# Altium PCB somiqboard.PcbDoc (part 2 of 10)
Units mm, origin at the board's own origin, x right, y up, seen from the top; angles counter-clockwise.
Board outline 110 x 96 mm, 4 copper layers (Top Layer, Ground_Plane, Power_Plane, Bottom Layer), stack 1.454 mm thick; 221 components, 356 nets, 1185 pads, 539 vias.
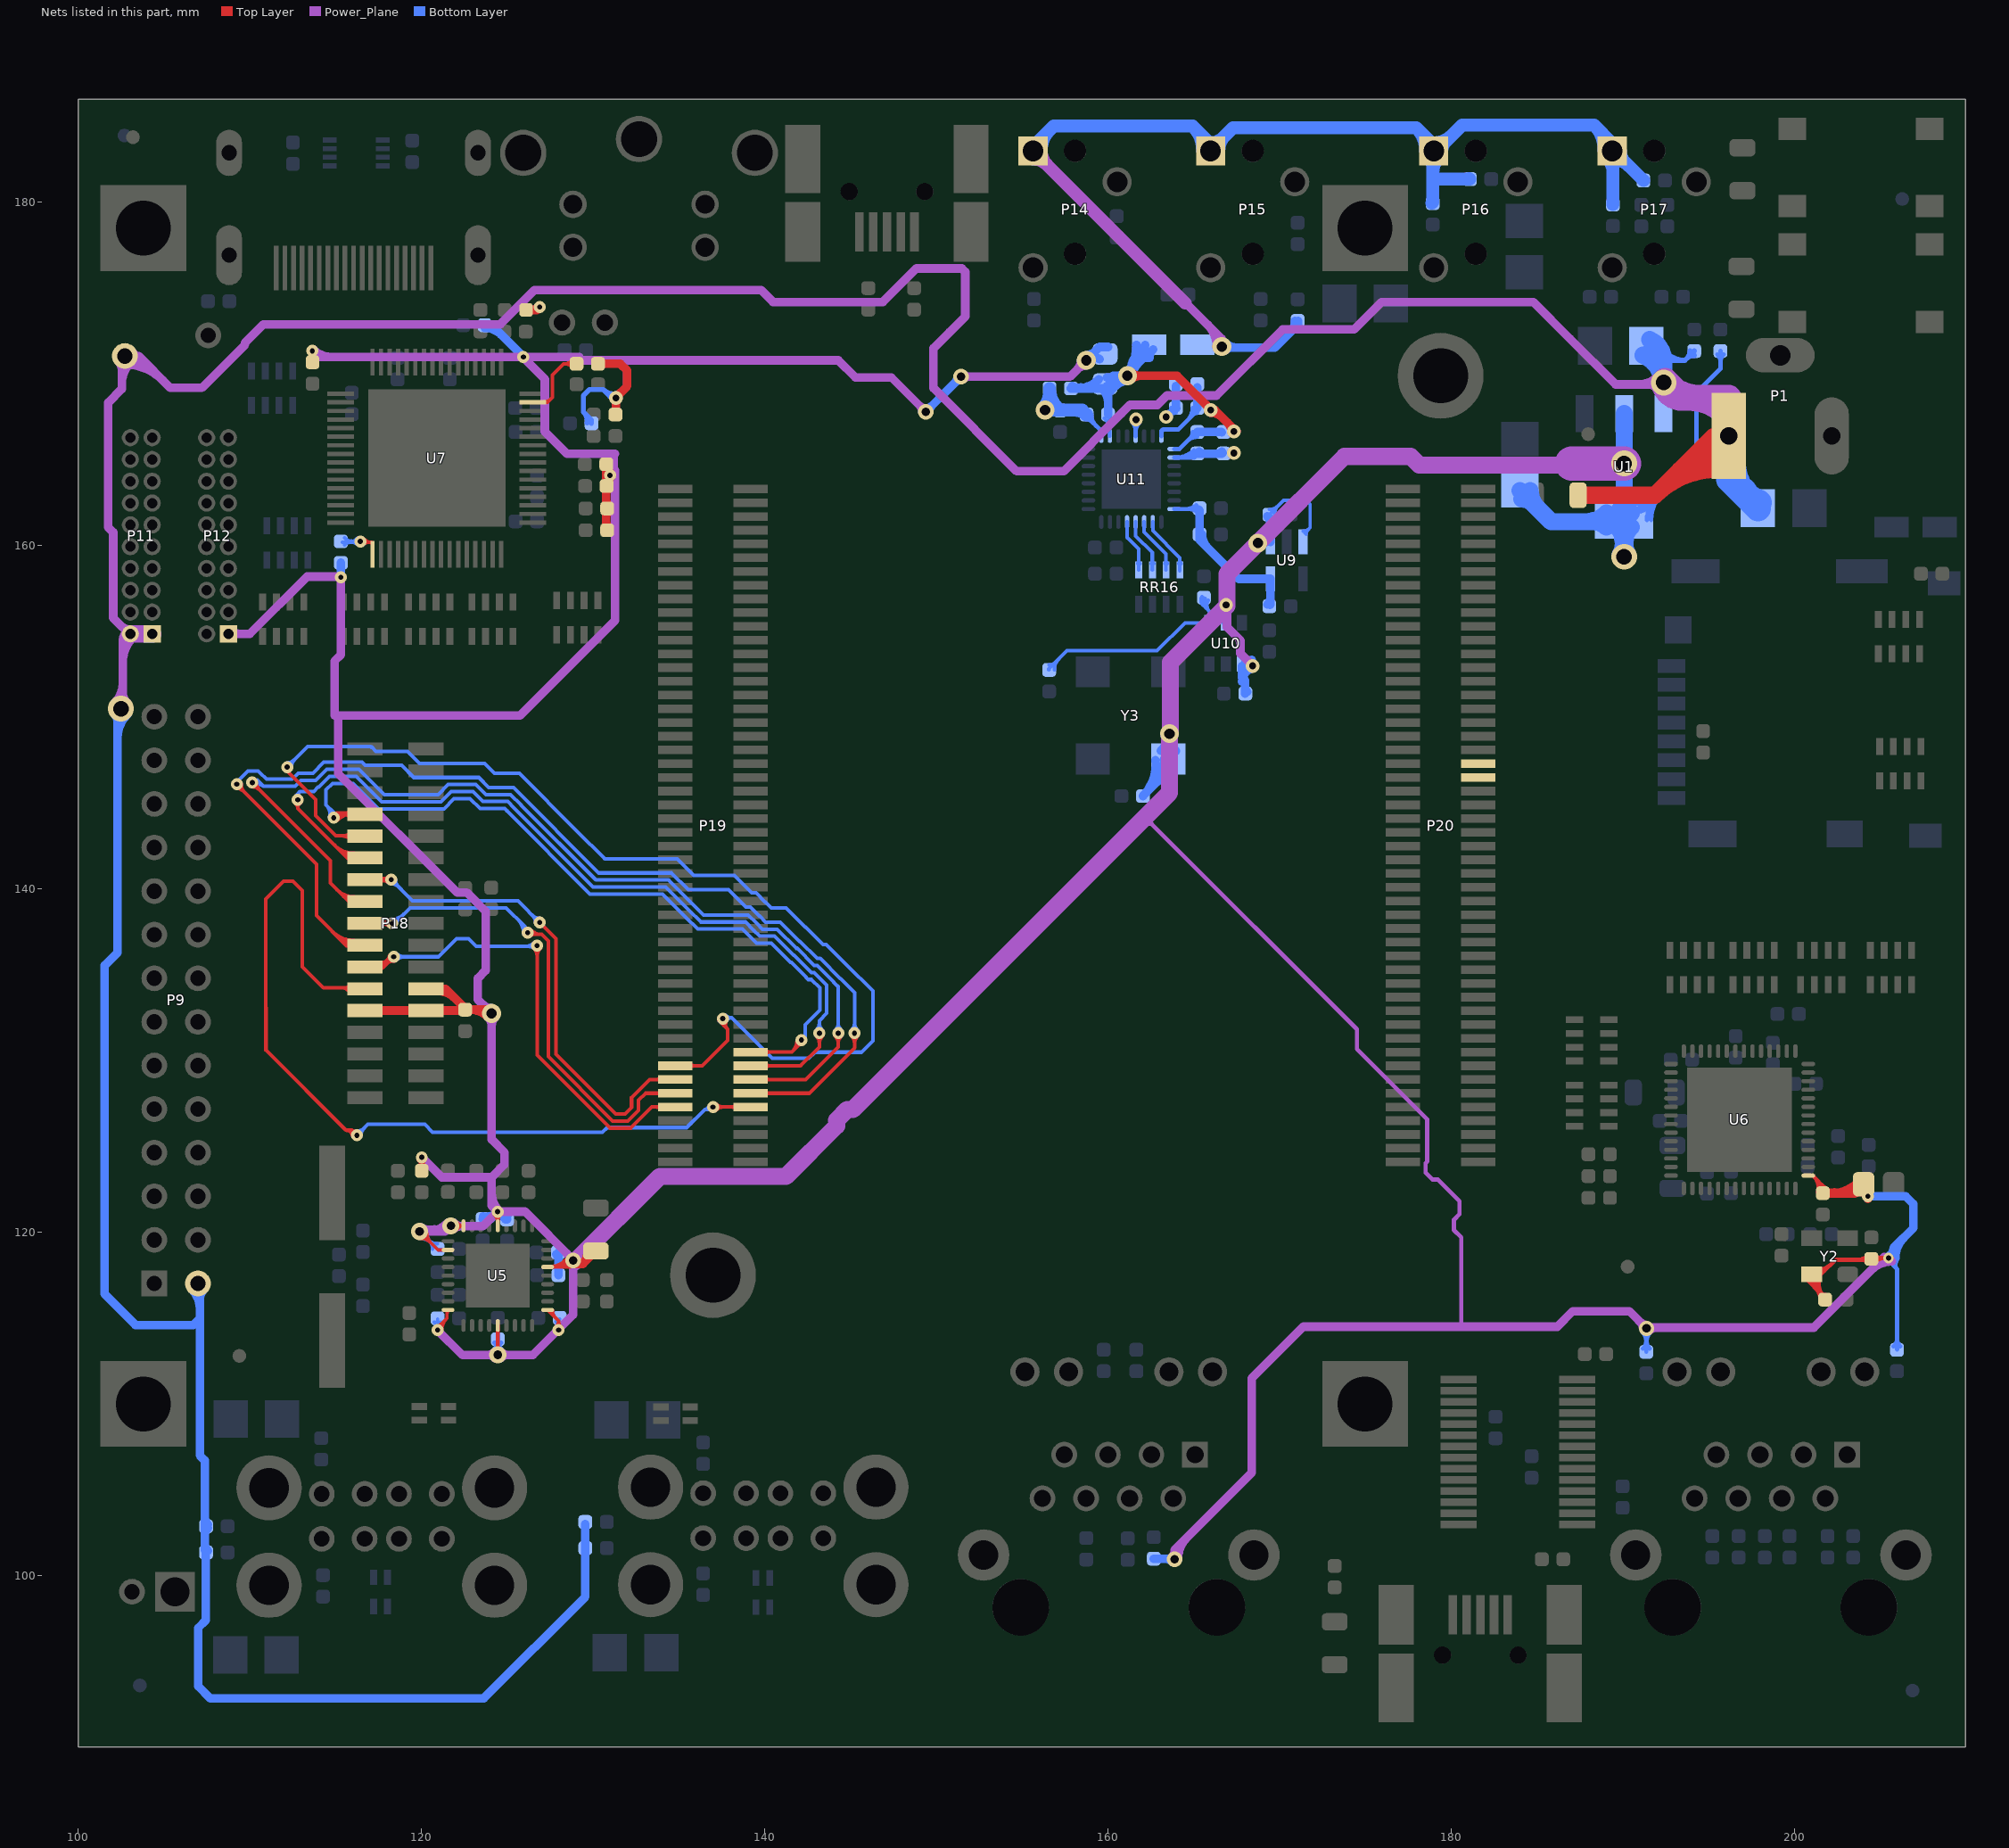
[diagram p4: the nets of this part, all layers, seen from the top]

## Via types
v1: diameter 0.7/0.7/0.7/0.7 (per signal layer), hole 0.3, Top Layer to Bottom Layer, tented both sides, 270 vias
v2: diameter 0.8, hole 0.3, Top Layer to Bottom Layer, tented both sides, 49 vias
v3: diameter 0.6/0.7/0.7/0.6 (per signal layer), hole 0.3, Top Layer to Bottom Layer, tented both sides, 47 vias
v4: diameter 0.6, hole 0.3, Top Layer to Bottom Layer, tented both sides, 43 vias
v5: diameter 1.1/1.1/1.1/1.1 (per signal layer), hole 0.6, Top Layer to Bottom Layer, tented both sides, 32 vias
v6: diameter 0.8/0.8/0.8/0.8 (per signal layer), hole 0.4, Top Layer to Bottom Layer, tented both sides, 31 vias
v7: diameter 0.9/0.9/0.9/0.9 (per signal layer), hole 0.5, Top Layer to Bottom Layer, tented both sides, 29 vias
v8: diameter 1.5/1.5/1.5/1.5 (per signal layer), hole 0.9, Top Layer to Bottom Layer, tented both sides, 14 vias
v9: diameter 1.2/1.2/1.2/1.2 (per signal layer), hole 0.6, Top Layer to Bottom Layer, tented both sides, 10 vias
v10: diameter 0.8/0.8/0.8/0.8 (per signal layer), hole 0.5, Top Layer to Bottom Layer, tented both sides, 6 vias
v11: diameter 1/1/1/1 (per signal layer), hole 0.5, Top Layer to Bottom Layer, tented both sides, 3 vias
v12: diameter 0.8/0.8/0.8/0.8 (per signal layer), hole 0.8, Top Layer to Bottom Layer, tented both sides, 2 vias
v13: diameter 1.2/1.2/1.2/1.2 (per signal layer), hole 1.2, Top Layer to Bottom Layer, tented both sides, 2 vias
v14: diameter 0.6/0.6/0.6/0.6 (per signal layer), hole 0.3, Top Layer to Bottom Layer, tented both sides, 1 vias

## Nets (pads, with @x,y where several pads share a name; then routed paths per layer and width w, separated by ;. In a path a pad name is that pad's centre, name@x,y a point inside that pad or via, vN(x,y) a via of type N, cw(c..) or ccw(c..) an arc to the next point about the centre after c; other vN are vias at no path point)
3V3: C3.1 C15.2 C17.1 C19.1 C21.1 C23.1 C25.1 C26.1 C27.1 C45.2 C50.2 C60.1 C61.1 C63.1 C85.1 FB1.2 L6.1 L7.1 L8.1 L9.1 P12.1 P18.24 P18.25 P18.26 R2.2 R7.2 R15.2 R28.1 R29.1 R30.1 R31.1 R32.1 R34.1 R35.1 R37.1 R40.2 R41.1 R42.1 R56.2 U1.2 U1.4 U5.5 U5.10 U5.15 U5.23 U5.27 U5.29 U5.36 U6.1 U9.1 U9.3 U10.1 U10.5 Y2.4 Y3.4 | length 590.9
  Top Layer w0.2: R7.2@119.818,123.791 ccw(c119.306,124.303) 120.03,124.303 ccw(c120.754,124.303) R7.2@120.242,123.791 ; v1@119.853,124.193 cw(c119.426,123.766) 120.03,123.766 cw(c120.634,123.766) v1@120.207,124.193 ; v1@119.874,124.175 cw(c119.75,124.021) 119.941,123.97 cw(c120.16,123.911) v1@120.098,124.129 ; v11@119.9,119.65 cw(c119.9,118.684) 120.583,119.367 cw(c121.266,120.05) v11@120.3,120.05 ; v11(119.9,120.05) 120.975,118.975 U5.29@121.56,118.975 ; v1@119.962,124.129 cw(c119.9,123.911) 120.119,123.97 cw(c120.31,124.021) v1@120.186,124.175 ; R7.2@120.03,123.579 v1(120.03,124.37) ; v1@120.95,114.45 121.5,115 121.5,115.415 U5.36@121.56,115.475 ; v1@120.95,114.55 ccw(c120.95,114.791) 121.121,114.621 ; v1@121,114.3 cw(c121.483,114.3) 121.141,114.641 ; v1@121.2,114.3 cw(c122.166,114.3) 121.483,114.983 ; 121.5,115.27 cw(c121.765,115.27) U5.36@121.578,115.457 ; v11(121.725,120.375) U5.27@122.46,120.375 ; v11@122.061,120.158 cw(c122.46,119.9) U5.27@122.46,120.375 ; v11@122.061,120.592 ccw(c122.46,120.85) U5.27@122.46,120.375 ; v1@124.273,121.023 cw(c123.821,120.571) U5.23@124.46,120.571 ; U5.23@124.46,120.375 v1@124.46,121.11 ; U5.23@124.46,120.621 cw(c125.029,120.621) v1@124.627,121.023 ; U5.10@127.36,115.475 128,114.835 ; U5.15@127.36,117.975 128.575,117.975 ; U5.15@127.36,117.975 ccw(c127.36,119.518) v7@128.575,118.566 ; U5.10@127.435,115.475 ccw(c127.616,115.475) 127.488,115.347 ; U5.10@127.635,115.475 ccw(c128.299,115.475) 127.829,115.006 ; 127.771,117.975 ccw(c127.771,119.196) v7@128.732,118.443 ; v1@127.84,114.492 ccw(c127.553,114.835) 128,114.835 ; v1(128,114.3) 128,114.835 ; v1@128.16,114.492 cw(c128.447,114.835) 128,114.835 ; 128.182,117.975 ccw(c128.182,118.874) v7@128.889,118.319 ; 128.593,117.975 ccw(c128.593,118.551) v7@129.047,118.196 ; Y2.4@200.748,117.692 ccw(c201.283,117.514) Y2.4@200.884,117.116 ; Y2.4@200.813,117.206 cw(c200.79,117.079) 200.919,117.079 cw(c201.085,117.079) Y2.4@201.017,117.23 ; U6.1@200.824,123.305 U6.1@201.095,123.305 ; Y2.4@200.919,117.475 200.919,117.081 201.8,116.2 cw(c202.657,117.057) Y2.4@201.507,117.439 ; Y2.4@200.938,117.629 ccw(c201.626,117.4) 201.113,116.887 ; Y2.4@201.128,117.566 ccw(c201.97,117.285) 201.342,116.658 ; 201.207,116.793 cw(c200.491,116.078) R28.1@201.503,116.078 ; Y2.4@201.317,117.503 ccw(c202.313,117.171) R28.1@201.571,116.429 ; 201.357,123.043 cw(c200.781,122.468) C45.2@201.578,122.301 ; C45.2@201.382,122.342 ccw(c200.348,122.558) U6.1@201.095,123.305 ; 201.494,116.506 ccw(c201.803,116.815) R28.1@201.803,116.378 ; R28.1@201.548,116.452 cw(c201.174,116.078) R28.1@201.703,116.078 ; 201.618,122.782 cw(c201.214,122.377) C45.2@201.774,122.261 ; 201.65,122.75 U6.1@201.095,123.305 ; R28.1@201.803,116.078 R28.1@201.803,116.197
  Top Layer w0.25: v11(124.46,112.86) U5.5@124.46,114.575 ; Y2.4@201.195,117.622 ccw(c201.355,118.191) 201.773,117.773 ; Y2.4@201.263,117.863 ccw(c201.488,118.662) 202.075,118.075 ; 201.4,116.6 200.919,117.081 200.792,117.208 200.792,117.65 201.65,117.65 ; Y2.4@201.426,117.756 ccw(c201.65,117.939) 201.65,117.65 ; Y2.4@201.498,117.514 cw(c201.65,117.497) 201.65,117.65 ; 203.715,118.4 ccw(c203.715,119.235) C50.2@204.306,118.644 ; 203.957,118.4 cw(c203.957,117.907) C50.2@204.306,118.256 ; C50.2@204.15,118.4 202.422,118.4 202.097,118.075 202.075,118.075 ; C50.2@204.216,118.511 v14@205.7,118.511 ; C50.2@204.694,118.256 cw(c205.311,117.639) v14@205.311,118.511 ; C50.2@204.694,118.644 ccw(c205.017,118.967) 205.017,118.511 ; 201.65,117.65 202.075,118.075
  Top Layer w0.5: P18.25@116.716,132.919 120.069,132.919 P18.26@120.1,132.95 ; P18.26@120.266,132.919 122.481,132.919 C85.1@122.5,132.9 ; P18.24@120.266,134.189 121.411,134.189 C85.1@122.5,133.1 ; P18.24@120.911,134.059 cw(c120.911,132.538) 121.986,133.614 ; 122.072,132.919 ccw(c122.072,133.452) C85.1@122.449,133.075 ; 122.245,133.355 cw(c121.859,132.969) C85.1@122.405,132.969 ; C85.1@122.555,132.969 v5@124.08,132.969 ; C85.1@122.846,132.969 cw(c122.846,131.496) v5@123.888,132.538 ; L6.1@126.111,173.736 126.736,173.736 v3(126.9,173.9) cw(c126.526,174.274) L6.1@126.203,173.855 ; L6.1@126.383,173.736 ccw(c126.383,174.417) v3@126.865,173.935 ; v7@128.85,118.15 129.413,118.15 ; v7@129.039,118.416 ccw(c129.413,118.546) 129.413,118.15 ; 129.413,118.15 ccw(c128.767,118.796) R56.2@129.676,118.887 ; R56.2@130.175,118.912 129.413,118.15 ; R37.1@130.3,170.6 131.6,170.6 132,170.2 132,169.3 v6@131.3,168.6 ; 130.782,161.391 ccw(c131.325,161.391) R31.1@130.941,161.007 ; 130.782,161.681 cw(c131.325,161.681) R35.1@130.941,162.065 ; 130.782,162.661 ccw(c131.325,162.661) R35.1@130.941,162.277 ; 130.782,163.067 cw(c131.212,163.067) R32.1@130.908,163.371 ; R32.1@130.782,163.332 cw(c131.768,163.332) v1@131.071,164.029 ; v1@130.782,163.887 ccw(c131.212,163.887) R32.1@130.908,163.583 ; R40.2@130.782,164.782 R40.2@130.782,164.747 ; R31.1@130.85,160.9 130.782,160.968 R40.2@130.782,164.747 ; v1@131.061,164.179 cw(c131.499,164.747) R40.2@130.782,164.747 ; R34.1@131.212,167.746 ccw(c130.879,168.079) 131.35,168.079 ; R34.1@131.318,167.64 131.35,167.672 v6(131.35,168.6) ; v6@131.5,168.6 cw(c131.983,168.6) 131.641,168.941 ; C45.2@201.676,122.535 201.676,122.374 201.8,122.25 203.55,122.25 FB1.2@204.025,122.725 ; C45.2@201.751,122.411 ccw(c202.152,123.106) 202.36,122.331 ; C45.2@201.782,122.387 ccw(c202.113,122.718) 202.113,122.25 ; C45.2@202.058,122.25 ccw(c202.058,124.692) FB1.2@203.785,122.965 ; 203.265,122.25 ccw(c203.265,123.485) FB1.2@204.138,122.612 ; FB1.2@203.986,122.331 cw(c203.921,121.957) v3@204.3,121.957 ; v3@204.3,122 v3(204.3,122.1) 204.3,122.15 204.05,122.4 FB1.2@204.05,122.8 ccw(c204.967,122.8) FB1.2@204.334,122.136
  Top Layer w1: v8(190.094,159.356) v8@190.1,159.35
  Power_Plane w0.25: 161.95,143.8 162.555,143.8 174.525,131.83 174.525,130.67 178.62,126.575 178.62,124.125 178.525,124.029 178.525,123.47 178.92,123.075 179.233,123.075 180.5,121.808 180.5,121.055 180.175,120.73 180.175,120.125 180.6,119.7 180.6,114.5
  Power_Plane w0.3: v6(131.35,168.6) 131.9,169.15 131.9,170.75 ; v6@131.35,168.85 ccw(c131.35,169.454) 131.777,169.027 ccw(c132.204,168.6) v6@131.6,168.6
  Power_Plane w0.5: P12.1@108.8,154.85 P12.1@108.8,154.827 ; P12.1@108.927,154.7 P12.1@108.8,154.827 ; P12.1@108.94,154.687 cw(c109.367,154.26) 109.367,154.864 cw(c109.367,155.468) P12.1@108.94,155.041 ; v1(113.65,171.35) 114,171 v1@125.9,171 ; v1@113.721,171.421 ccw(c114.736,172.436) 114.736,171 ; 114.95,150.1 114.95,153.281 115.316,153.647 v1(115.316,158.166) ; 115,150.1 125.75,150.1 131.3,155.65 131.3,164.319 ; 115.159,149.89 115.159,146.726 122.086,139.8 122.65,139.8 123.75,138.7 123.75,135.25 123.3,134.8 123.3,133.55 v5(124.1,132.75) ; v1@115.25,158.2 113.35,158.2 110.014,154.864 P12.1@108.763,154.864 P12.1@108.8,154.827 ; v11(119.9,120.05) v11@121.4,120.05 ; v11@120.025,120.267 ccw(c120.52,121.123) 120.776,120.168 ; v1(120.03,124.37) 121.2,123.2 124.102,123.2 124.85,123.948 124.85,124.652 124.1,125.402 v5(124.1,132.75) ; v11@120.077,119.873 cw(c120.504,119.446) 120.504,120.05 cw(c120.504,120.654) v11@120.077,120.227 ; v11@120.337,120.05 ccw(c120.337,121.763) v11@121.548,120.552 ; v1(120.95,114.3) 122.4,112.85 126.5,112.85 128.85,115.2 v7@128.85,118.2 ; v11@121.725,120.35 123.6,120.35 v1(124.45,121.2) ; v11@121.902,120.198 cw(c122.268,119.832) 122.268,120.35 ; v11@121.902,120.552 ccw(c122.389,121.039) 122.389,120.35 ; 123.587,133.263 cw(c123.074,132.75) v5@123.8,132.75 ; 123.589,133.262 ccw(c124.1,133.773) v5@124.1,133.05 ; 123.832,112.85 ccw(c123.832,113.488) v11@124.283,113.037 ; 123.881,112.85 cw(c123.881,112.281) v11@124.283,112.683 ; v5@123.888,132.538 cw(c123.375,132.025) 124.1,132.025 cw(c124.824,132.025) v5@124.312,132.538 ; 124.1,122.286 ccw(c125.536,122.286) v1@124.52,121.27 ; 124.1,123.198 124.1,121.55 v1@124.45,121.2 ; v11@124.637,112.683 cw(c125.039,112.281) 125.039,112.85 ; v11@124.637,113.037 ccw(c125.088,113.488) 125.088,112.85 ; v1@125.95,170.95 127.2,169.7 127.2,166.65 128.5,165.35 131.3,165.35 ; v1(125.95,171) 129.2,171 ; 128.473,118.777 cw(c128.046,118.35) v7@128.65,118.35 ; v7@128.709,118.209 cw(c128.367,117.867) 128.85,117.867 cw(c129.333,117.867) v7@128.991,118.209 ; v7@128.875,118.375 126.05,121.2 v1(124.45,121.2) ; 129.5,170.8 144.303,170.8 145.303,169.8 147.4,169.8 v7(149.4,167.8) ; v1@130.929,164.029 cw(c130.035,163.135) 131.3,163.135 ; v1@130.929,164.171 ccw(c130.276,164.824) 131.2,164.824 ; 131.2,164.419 131.2,165.25 ; 131.283,164.383 cw(c131.242,164.342) 131.3,164.342 ; v7@149.2,167.8 ccw(c148.717,167.8) 149.059,168.141 ccw(c149.4,168.483) v7@149.4,168 ; v7(151.45,169.85) 157.8,169.85 v5(158.75,170.8) ; v7@151.591,169.709 cw(c151.933,169.367) 151.933,169.85 cw(c151.933,170.333) v7@151.591,169.991 ; v5@158.45,170.8 cw(c157.726,170.8) 158.238,170.288 cw(c158.75,169.776) v5@158.75,170.5 ; v7@163.759,101.091 ccw(c163.417,101.433) 163.9,101.433 ccw(c164.383,101.433) v7@164.041,101.091 ; v7@163.9,100.9 v7(163.9,100.95) 163.9,101.5 168.4,106 168.4,111.5 171.4,114.5 180.6,114.5 186.2,114.5 187.1,115.4 190.4,115.4 v7(191.4,114.4) ; v7@164.1,100.95 cw(c165.911,100.95) 164.63,102.23 ; v6@166.794,156.444 cw(c166.417,156.067) 166.95,156.067 ; v6@166.95,156.5 166.95,155.252 167.728,154.474 167.728,153.722 v6(168.45,153) ; v7@191.2,114.4 ccw(c190.717,114.4) 191.059,114.741 ccw(c191.4,115.083) v7@191.4,114.6 ; v7@191.4,114.45 201.15,114.45 v14@205.25,118.55 ; v7@191.541,114.259 cw(c192.004,113.796) 192.004,114.45 ; 204.505,117.805 cw(c205.7,116.61) v14@205.7,118.3
  Power_Plane w1: v7@128.925,118.275 133.9,123.25 141.25,123.25 144.2,126.2 ; 144.2,126.535 144.815,127.15 ; 145.15,127.15 163.6,145.6 v5(163.6,149.05) ; v5@163.65,149.05 163.65,153.2 v6@166.95,156.5 ; v6@166.95,156.55 166.95,158.35 v5(168.75,160.15) 173.8,165.2 177.656,165.2 178.156,164.7 187.044,164.7 ; v8(190.094,159.356) v8@190.144,159.356 ; v8@190.1,159.4 v8@190.144,159.356 ; v8@190.162,159.338 v8@190.144,159.356
  Power_Plane w2: 187.044,164.794 v8(190.094,164.794)
  Bottom Layer w0.2: v11@119.9,119.65 cw(c119.9,118.614) C21.1@120.633,119.347 ; v11@119.9,119.85 cw(c119.9,119.297) 120.291,119.688 ; v11@119.929,120.05 C21.1@120.955,119.024 ; v11@120.3,120.05 ccw(c121.195,120.05) 120.562,119.417 ; C21.1@120.655,119.024 ccw(c119.931,119.024) 120.443,119.537 ccw(c120.955,120.049) C21.1@120.955,119.324 ; C23.1@120.749,114.768 cw(c120.306,114.3) v1(120.95,114.3) ; v1@120.773,114.477 ccw(c120.346,114.904) 120.95,114.904 ccw(c121.554,114.904) v1@121.127,114.477 ; C23.1@120.95,114.95 v1(120.95,114.3) ; C23.1@121.156,114.763 ccw(c121.574,114.3) v1(120.95,114.3) ; C15.2@123.536,120.683 ccw(c123.711,121.098) 124.029,120.779 ; C15.2@123.614,120.867 ccw(c123.836,121.393) v1@124.24,120.99 ; C15.2@123.692,121.051 ccw(c123.96,121.689) v1(124.45,121.2) 124.025,120.775 ; C15.2@123.88,120.63 124.025,120.775 ; C15.2@123.945,120.82 ccw(c123.688,121.266) v1@124.201,121.221 ; 124.025,120.775 ccw(c123.603,121.197) v1@124.2,121.199 ; 124.126,120.924 cw(c124.297,120.629) v1@124.385,120.958 ; v1@124.449,120.95 ccw(c124.447,120.353) 124.025,120.775 ; v1@127.824,114.478 ccw(c127.405,114.9) C19.1@128,114.9 ; C19.1@127.855,114.799 cw(c127.504,114.448) v1@128,114.448 ; v1@128,114.297 cw(c128.579,114.297) C19.1@128.242,114.767 ; v1(128,114.3) C19.1@128,114.9 ; C19.1@128.05,114.95 C19.1@128,114.9 ; v1@128.176,114.478 cw(c128.595,114.9) C19.1@128,114.9 ; 128.341,118.15 ccw(c128.341,118.545) v7@128.71,118.404 ; v7@128.523,118.475 cw(c128.05,118.657) 128.05,118.15 v7@128.75,118.15 ; C60.1@169.418,161.81 170.258,162.65 171.55,162.65 171.8,162.4 171.8,161.05 U9.3@171.5,160.75 ; C60.1@169.418,162.11 ccw(c169.418,162.834) 169.93,162.322 ccw(c170.442,161.81) C60.1@169.718,161.81 ; U9.3@171.384,160.843 ccw(c171.384,161.348) 171.741,160.991 ; U9.3@171.559,160.668 cw(c171.899,160.668) U9.3@171.659,160.909
  Bottom Layer w0.25: v11@124.195,113.125 ccw(c123.555,113.765) C17.1@124.46,113.767 ccw(c125.365,113.765) v11@124.725,113.125 ; C17.1@124.266,113.572 cw(c123.796,113.103) 124.46,113.103 cw(c125.124,113.103) C17.1@124.654,113.572 ; v11@124.45,112.75 124.46,112.76 v11(124.46,112.86) C17.1@124.46,113.767 ; U1.4@190.719,161.942 ccw(c190.719,163.085) U1.4@191.527,162.277 ; U1.4@190.719,162.192 ccw(c190.719,163.938) 191.954,162.704 ; U1.4@190.719,162.442 ccw(c190.719,164.792) 192.38,163.13 ; v7@191.17,114.17 cw(c190.642,113.642) 191.389,113.642 ; R30.1@191.195,113.224 ccw(c190.725,113.694) 191.389,113.694 ccw(c192.053,113.694) R30.1@191.583,113.224 ; R30.1@191.389,113.03 v7@191.389,114.389 ; 191.389,113.589 cw(c192.211,113.589) v7@191.63,114.17 ; U1.4@191.419,161.492 cw(c193.052,161.492) 191.897,162.647 ; U1.4@191.55,162.2 191.55,162.3 194.31,165.06 194.31,168.91 ; U1.4@191.669,161.492 cw(c193.906,161.492) 192.324,163.074 ; 194.3,168.9 194.31,168.91 ; R2.2@195.513,171.149 cw(c195.043,170.679) 195.707,170.679 cw(c196.371,170.679) R2.2@195.901,171.149 ; R2.2@195.707,171.343 195.707,170.307 194.31,168.91 ; R29.1@205.8,113.351 ccw(c205.33,113.821) 205.994,113.821 ccw(c206.658,113.821) R29.1@206.188,113.351 ; 205.8,118.6 205.7,118.5 205.8,118.4 205.8,118.05 205.994,117.856 ; 205.961,118.306 ccw(c206.238,118.1) 205.994,117.856 ; R29.1@205.994,113.157 205.994,117.856
  Bottom Layer w0.3: L8.1@129.672,167.159 ccw(c128.902,167.242) 129.45,167.789 ; L8.1@129.921,167.132 129.921,167.318 129.45,167.789 ; v6@131,168.7 130.6,169.1 ; v6@131.321,168.848 cw(c131.221,169.721) 130.6,169.1 ; 129.45,167.789 129.45,168.75 129.8,169.1 130.6,169.1
  Bottom Layer w0.5: v1(115.316,158.166) R42.1@115.316,159.004 ; C15.2@123.575,120.775 124.025,120.775 124.05,120.775 v1@124.463,121.187 ; C15.2@123.603,120.922 ccw(c123.782,121.868) v1@124.462,121.187 ; L7.1@123.698,172.697 cw(c123.698,171.357) 124.645,172.305 ; L7.1@123.698,172.847 124.103,172.847 v1(125.95,171) ; v1@124.45,121.2 v1@124.463,121.187 ; v1@124.475,121.2 v1@124.463,121.187 ; C27.1@125,120.75 124.9,120.75 v1@124.463,121.187 ; C26.1@127.859,118.715 cw(c127.542,118.398) 127.991,118.398 ; C25.1@127.991,117.5 C26.1@127.991,118.821 ; v7(149.4,167.8) v7(151.45,169.85) ; v7@149.4,168 ccw(c149.4,168.483) 149.741,168.141 ccw(c150.083,167.8) v7@149.6,167.8 ; v7@151.25,169.85 cw(c150.767,169.85) 151.109,169.509 cw(c151.45,169.167) v7@151.45,169.65 ; v5@158.75,171.1 ccw(c158.75,171.824) 159.262,171.312 ccw(c159.774,170.8) v5@159.05,170.8 ; L9.1@159.534,170.868 ccw(c159.183,170.367) v5(158.75,170.8) 159.527,171.577 L9.1@160.02,171.577 ; R15.2@162.687,100.985 v7@163.865,100.985 ; Y3.4@162.785,147.503 cw(c160.246,147.222) C61.1@162.052,145.415 163.65,147.013 Y3.4@163.65,147.6 ; 162.788,146.151 ccw(c161.571,147.368) Y3.4@163.282,147.558 ; Y3.4@163.103,148.063 ccw(c162.237,149.05) v5@163.55,149.05 ; 163.333,100.985 cw(c163.333,100.383) v7@163.759,100.809 ; v5@163.34,148.9 cw(c162.856,148.62) 163.396,148.475 ; Y3.4@163.353,148.313 cw(c164.066,148.122) v5@163.735,148.782 ; v5@163.388,148.838 cw(c162.996,148.446) Y3.4@163.55,148.446 ; v5@163.45,148.79 cw(c163.17,148.306) Y3.4@163.711,148.451 ; Y3.4@163.531,147.574 163.55,147.593 v5@163.55,149.05 ; Y3.4@163.55,148.205 cw(c164.445,148.205) v5@163.812,148.838 ; Y3.4@163.715,148.435 cw(c164.133,148.547) v5@163.818,148.844 ; Y3.4@163.98,148.044 cw(c164.942,149.05) v5@163.55,149.05 ; U10.5@166.878,155.505 v6@166.878,156.55 ; 166.878,156.135 cw(c167.315,156.135) v6@167.006,156.444 ; 167.828,152.08 cw(c168.612,152.08) v6@168.476,152.852 ; 167.828,152.322 U10.1@167.828,153 ; U10.1@167.828,152.676 cw(c168.507,152.676) v6@168.389,153.345 ; C63.1@168,151.384 168,152.15 ; 168,151.797 ccw(c168.434,151.797) C63.1@168.127,151.49 ; v5@168.659,160.436 ccw(c168.297,161.566) C60.1@169.484,161.566 ; v5@168.811,159.959 ccw(c168.516,160.881) U9.1@169.484,160.881 ; C60.1@169.312,161.704 cw(c168.897,161.289) 169.484,161.289 ; C60.1@169.35,161.7 C60.1@169.484,161.566 ; U9.1@169.484,160.218 C60.1@169.484,161.566 ; v3(204.3,122.1) 206.5,122.1 206.95,121.65 206.95,120.25 205.8,119.1 ; v14@205.58,118.66 ccw(c205.25,119.1) 205.8,119.1 ; 205.8,118.6 205.8,119.1 ; 205.9,118.5 cw(c207.59,118.5) 206.395,119.695 ; v1@124.546,121.226 ccw(c124.927,121.328) C27.1@124.73,120.986 ; v1@124.546,121.226 ccw(c124.927,121.328) C27.1@124.73,120.986 ; v1@124.546,121.226 ccw(c124.927,121.328) C27.1@124.73,120.986 ; v1@124.573,121.077 ccw(c125,121.503) C27.1@125,120.9 ; v1@124.573,121.077 ccw(c125,121.503) C27.1@125,120.9 ; v1@124.573,121.077 ccw(c125,121.504) C27.1@125,120.9
  Bottom Layer w1: C3.1@184.023,163.219 185.842,161.4 U1.4@190.05,161.4 ; C3.1@184.123,162.719 cw(c184.123,161.753) C3.1@184.806,162.436 ; C3.1@184.623,163.219 ccw(c186.072,163.219) 185.047,162.195 ; 187.858,161.4 ccw(c187.858,163.102) U1.4@189.062,161.899 ; 188.303,161.4 cw(c188.303,160.326) U1.4@189.062,161.085 ; U1.4@189.687,161.085 cw(c188.705,160.104) 190.094,160.104 cw(c191.482,160.104) U1.4@190.5,161.085 ; U1.4@189.687,161.899 ccw(c188.705,162.88) 190.094,162.88 ccw(c191.482,162.88) U1.4@190.5,161.899 ; v8@189.877,159.481 ccw(c188.782,160.113) U1.4@190.003,160.441 ; U1.4@190.05,161.65 190.094,161.694 v8(190.094,164.794) U1.2@190.094,167.692 ; v8(190.094,159.356) U1.4@190.094,161.492 ; U1.4@190.184,160.441 ccw(c191.405,160.113) v8@190.31,159.481
  other v1: 131,164.1
  other v6: 166.9,156.55
  other v7: 128.85,118.35
  other v14: 205.5,118.5
5V0: C1.1 C2.1 F1.2 F2.2 F3.2 F4.2 P1.1 P9.2 P11.1 P11.2 R1.2 R57.2 RT1.1 U1.3 | length 303.7
  Top Layer w1: R57.2@187.412,162.941 191.891,162.941 ; 193.34,164.39 cw(c195.822,161.909) P1.1@196.251,165.392 ; 194.789,165.839 cw(c196.139,164.489) P1.1@196.373,166.384 ; P1.1@196.128,164.399 ccw(c195.504,159.329) 191.891,162.941 ; P1.1@196.15,166.35 195.3,166.35 191.891,162.941
  Power_Plane w0.5: v8@102.146,150.853 ccw(c101.051,151.949) 102.6,151.949 ; RT1.1@102.376,170.7 cw(c101.954,170.278) 102.55,170.278 ; RT1.1@102.4,171.05 RT1.1@102.65,171.05 ; 102.496,155.343 ccw(c103.048,155.895) P11.2@103.048,155.114 ; v8@102.55,150.5 102.6,150.55 102.6,154.416 P11.2@103.048,154.864 102.974,154.864 102.05,155.788 102.05,160.119 102.05,160.781 101.75,161.081 101.75,168.331 101.759,168.341 102.55,169.131 102.55,170.95 RT1.1@102.65,171.05 ; 102.55,169.414 cw(c104.368,169.414) RT1.1@103.083,170.7 ; 102.6,151.465 ccw(c103.465,151.465) v8@102.853,150.853 ; 102.6,153.179 cw(c104.733,153.179) P11.2@103.225,154.687 ; 102.6,154.386 cw(c103.526,154.386) P11.2@102.871,155.041 ; RT1.1@102.7,171.1 RT1.1@102.65,171.05 ; RT1.1@102.729,170.553 cw(c102.729,167.423) 104.942,169.636 ; RT1.1@102.729,171.053 cw(c102.729,169.13) 104.089,170.49 ; RT1.1@103.177,170.832 cw(c103.529,170.658) 103.529,171.05 ; RT1.1@103.18,171.27 ccw(c103.529,171.437) 103.529,171.05 ; 122.002,172.9 110.8,172.9 109.731,171.831 109.731,171.714 107.217,169.2 105.379,169.2 103.529,171.05 ; 122.002,172.9 124.6,172.9 126.6,174.9 139.8,174.9 140.5,174.2 146.9,174.2 148.85,176.15 151.5,176.15 151.7,175.95 151.7,173.35 150.787,172.437 149.85,171.5 149.85,169.187 154.695,164.342 157.442,164.342 160.8,167.7 160.8,167.702 161.298,168.2 161.86,168.2 162.898,168.2 163.448,168.75 166.34,168.75 170.19,172.6 174.356,172.6 175.956,174.2 184.8,174.2 186.944,172.056 189.6,169.4 v8@192.5,169.4 ; 190.937,169.4 ccw(c190.937,170.969) v8@192.046,169.86 ; 191.449,169.4 cw(c191.449,168.555) v8@192.046,169.153 ; RT1.1@102.65,171.05 103.529,171.05
  Power_Plane w1: P11.2@103.048,154.864 P11.1@104.318,154.864 104.336,154.864 P11.1@104.35,154.85
  Power_Plane w1.5: v8@192.497,169.603 193.49,168.61 ; 193.86,168.61 cw(c193.86,165.566) P1.1@196.013,167.719 ; 194.562,168.61 cw(c194.562,171.668) v8(192.4,169.506) ccw(c193.49,169.721) 193.49,168.61 ; P1.1@196.19,166.395 196.19,168.61 193.49,168.61
  Bottom Layer w0.3: C2.1@191.343,171.537 ccw(c192.377,171.894) C2.1@192.377,170.8 ; C2.1@191.627,171.635 ccw(c192.798,172.039) 192.798,170.8 ; C2.1@191.91,171.733 ccw(c193.219,172.184) 193.219,170.8 ; C2.1@192.194,171.831 ccw(c193.64,172.33) 193.64,170.8 ; 192.5,170.8 193.64,170.8 ; R1.2@193.933,171.343 cw(c193.329,171.343) 193.756,170.916 cw(c194.183,170.489) R1.2@194.183,171.093 ; R1.2@194.183,171.343 193.64,170.8
  Bottom Layer w0.5: v8@102.146,150.146 cw(c101.775,149.775) 102.3,149.775 ; 102.3,148.81 cw(c104.189,148.81) v8@102.853,150.146 ; v8@102.3,150.5 102.3,136.3 101.55,135.55 101.55,116.4 103.35,114.6 106.72,114.6 106.985,114.865 ; P9.2@106.631,116.664 cw(c105.5,115.533) 107.1,115.533 ; 107.1,116.089 cw(c107.914,116.089) P9.2@107.339,116.664 ; P9.2@107.1,116.6 107.1,107 107.386,106.714 F3.2@107.386,102.87 ; 107.386,101.892 ccw(c108.008,101.892) F4.2@107.568,101.452 ; 107.386,102.324 cw(c108.008,102.324) F3.2@107.568,102.764 ; F3.2@107.386,102.819 107.386,101.464 107.45,101.4 107.45,97.4 107,96.95 107,93.55 107.7,92.85 123.65,92.85 129.56,98.76 F2.2@129.56,101.6 F1.2@129.56,102.997 ; 107.386,103.416 ccw(c108.008,103.416) F3.2@107.568,102.976
  Bottom Layer w1: C2.1@191.193,171.094 cw(c190.413,169.274) v8@192.394,169.274 ; C2.1@191.587,172.013 cw(c191.063,170.79) 192.394,170.79 ; 192.138,170.227 ccw(c192.94,170.441) v8@192.525,169.723 ; v8@192.394,169.506 192.394,170.606
  Bottom Layer w1.5: P1.1@196.2,166.95 196.2,163.869 C1.1@197.89,162.179 ; P1.1@196.44,164.895 ccw(c199.496,164.895) C1.1@197.335,162.734 ; C1.1@197.063,163.205 ccw(c198.335,163.939) C1.1@197.955,162.52
  other v8: 102.5,150.5
410_NC: R42.2 U7.49 | length 5.4
  Top Layer w0.21: v1(116.45,160.25) 116.4,160.2 U7.49@117.1,160.2 ; v1@116.623,160.076 cw(c116.921,159.778) 116.921,160.2 ; v1@116.634,160.411 ccw(c117.1,160.82) U7.49@117.1,160.2 ; 116.985,160.2 cw(c116.985,159.981) U7.49@117.14,160.136 ; U7.49@117.15,160.15 U7.49@117.1,160.2
  Bottom Layer w0.21: R42.2@115.4,160.2 116.4,160.2 v1(116.45,160.25) ; R42.2@115.525,160.045 cw(c115.898,159.672) 115.898,160.2 ; R42.2@115.525,160.463 ccw(c116.159,161.097) v1@116.159,160.2 ; 115.738,160.2 ccw(c115.738,160.961) v1@116.277,160.423 ; 115.917,160.265 ccw(c115.996,160.559) v1@116.247,160.388 ; 115.978,160.2 cw(c115.978,159.778) v1@116.277,160.076
AGND: C62.1 C71.2 C75.2 C78.2 C80.2 C81.2 C82.2 C83.2 P14.1 P15.1 P16.1 P17.1 R48.2 R51.1 R52.1 R53.1 R54.1 U11.17 U11.21 U11.26 | length 112.1
  Power_Plane w0.5: 164.65,174.05 166.65,172.05 v5(166.65,171.6) ; 165.82,172.88 cw(c164.539,171.6) v5@166.35,171.6
  Power_Plane w0.75: P14.1@155.651,182.525 cw(c155.651,181.378) 156.462,182.189 cw(c157.273,183) P14.1@156.126,183 ; P14.1@155.651,183 164.526,174.125
  Bottom Layer w0.25: C75.2@158.77,167.365 cw(c158.77,166.967) 159.052,167.248 ; C75.2@158.8,167.6 158.8,167.5 159.627,166.673 U11.17@159.627,166.385 ; C75.2@159.045,167.64 ccw(c159.974,167.64) 159.317,166.983 ; v6@161.455,167.155 cw(c161.041,166.741) U11.21@161.627,166.741 ; U11.21@161.627,166.385 161.627,167.477 161.65,167.5 v6(161.65,167.35) ; U11.21@161.627,166.631 cw(c162.369,166.631) v6@161.844,167.155 ; v6(163.4,167.5) 163.921,168.021 C80.2@163.977,168.021 ; v6@163.4,167.775 ccw(c163.4,168.439) 163.869,167.969 ccw(c164.339,167.5) v6@163.675,167.5 ; v6@163.412,167.512 cw(c163.977,166.947) C80.2@163.977,167.746 ; v6@163.547,167.647 ccw(c163.173,168.021) C80.2@163.702,168.021 ; U11.26@163.877,165.135 165.035,165.135 C78.2@165.25,165.35 ; U11.26@163.987,165.135 ccw(c163.987,166.614) C78.2@165.033,165.568 ; 164.591,165.135 ccw(c164.591,166.01) C78.2@165.209,165.392
  Bottom Layer w0.5: C82.2@163.977,169.291 163.977,168.023 C80.2@164,168 ; C78.2@165.2,165.35 165.25,165.35 166.6,165.35 C81.2@166.624,165.374 ; C78.2@165.333,165.48 ccw(c165.647,165.794) 165.647,165.35 ; 166.331,165.35 ccw(c166.331,165.794) C81.2@166.645,165.48 ; C81.2@166.65,165.35 C81.2@166.7,165.4 ; v5@166.75,171.55 169.75,171.55 171.1,172.9 C62.1@171.1,173.1 ; v5@166.862,171.388 cw(c167.254,170.996) 167.254,171.55 ; v5@166.862,171.812 ccw(c167.495,172.445) 167.495,171.55 ; 170.649,172.449 ccw(c169.997,173.101) C62.1@170.919,173.101
  Bottom Layer w0.75: P14.1@155.6,183.2 156.85,184.45 164.95,184.45 ; P14.1@156.126,183 cw(c157.879,183) 156.64,184.24 ; v5@156.2,167.9 v5(156.35,167.9) 158.51,167.9 C75.2@158.77,167.64 ; v5@156.226,168.024 ccw(c155.297,168.953) C83.2@156.611,168.953 ; v5@156.4,168 156.611,168.211 C83.2@156.611,169.164 ccw(c158.206,169.164) R48.2@157.241,167.894 ; 158.082,167.9 cw(c158.082,166.952) C75.2@158.752,167.622 ; P15.1@165.525,183.012 ccw(c163.56,183.06) 164.95,184.45 ; P15.1@166,183.475 ccw(c166,184.501) P15.1@166.726,183.776 ; P15.1@166.475,183 cw(c167.742,183) 166.846,183.896 ; P16.1@178.525,183.009 ccw(c176.679,183.044) 177.984,184.35 ; P16.1@178.664,182.664 cw(c177.974,181.974) 178.95,181.974 ; R53.1@178.891,179.959 178.95,180.018 178.95,182.45 P16.1@179.35,182.85 ; 178.95,181.733 cw(c180.267,181.733) P16.1@179.336,182.664 ; P16.1@179,183.475 ccw(c179,184.984) 180.067,183.917 ; 179.156,181.356 R51.1@181.102,181.356 R51.1@181.058,181.4 ; P16.1@179.25,183.1 180.65,184.5 188.35,184.5 ; P16.1@179.334,183 177.984,184.35 ; P16.1@179.475,183 cw(c180.26,183) P16.1@179.705,183.555 ; P17.1@188.925,183.021 ccw(c186.956,183.106) 188.35,184.5 ; P17.1@189.064,182.664 cw(c188.152,181.752) 189.442,181.752 ; P17.1@189.25,182.95 P17.1@189.4,182.95 ; P17.1@189.4,182.525 cw(c189.4,181.146) 190.375,182.121 ; P17.1@189.4,182.85 P17.1@189.4,182.95 ; R54.1@189.442,179.879 189.442,182.942 P17.1@189.45,182.95 ; 189.442,181.955 cw(c190.445,181.955) P17.1@189.736,182.664 ; P17.1@189.875,183 ccw(c190.79,183) P17.1@190.143,182.353 ; R52.1@191.22,181.276 189.546,182.95 P17.1@189.45,182.95 ; 164.95,184.45 P15.1@166.175,183.225 ; P15.1@166.175,183.225 167.3,184.35 177.984,184.35 ; P15.1@166.175,183.225 165.966,183.016 166.2,183.016 166.2,183.2 P15.1@166.175,183.225 ; 188.35,184.5 189.4,183.45 P17.1@189.4,183 ; P17.1@189.4,182.95 P17.1@189.4,183 ; P17.1@189.4,182.95 P17.1@189.45,182.95 ; P17.1@189.4,183 P17.1@189.45,182.95
  other v6: 167.35,165.4
AIC_1V8: C67.1 C77.1 C79.1 U9.5 U11.32 | length 12.1
  Bottom Layer w0.25: U11.32@163.877,162.135 165.235,162.135 C79.1@165.3,162.2 ; 164.585,162.135 ccw(c164.585,162.948) C79.1@165.16,162.373 ; 164.795,162.135 cw(c164.795,161.62) C79.1@165.16,161.985
  Bottom Layer w0.5: C79.1@165.3,162.1 165.354,162.046 C77.1@165.354,160.909 ; C77.1@165.35,160.85 165.35,160.35 167.632,158.068 U9.5@169.484,158.068 169.484,156.584 C67.1@169.45,156.55 ; C77.1@165.504,160.655 ccw(c166.612,160.655) 165.829,159.871 ; C67.1@169.312,156.582 ccw(c168.897,156.997) 169.484,156.997
AIC_BCLK: RR16.8 U11.2 | length 3.8
  Bottom Layer w0.21: U11.2@162.627,161.385 162.627,160.873 164.2,159.3 RR16.8@164.2,158.55 ; RR16.8@164.144,158.958 ccw(c164.008,159.094) 164.2,159.094 ; 164.2,159.147 ccw(c164.467,159.147) RR16.8@164.278,158.958
AIC_DIN: RR16.6 U11.4 | length 3.5
  Bottom Layer w0.21: U11.4@161.627,161.385 161.627,160.573 162.6,159.6 RR16.6@162.6,158.6 ; RR16.6@162.544,158.958 ccw(c162.408,159.094) 162.6,159.094 ; 162.6,159.147 ccw(c162.867,159.147) RR16.6@162.678,158.958
AIC_DOUT: RR16.5 U11.5 | length 3.4
  Bottom Layer w0.21: U11.5@161.127,161.385 161.127,160.473 161.8,159.8 RR16.5@161.8,158.6 ; RR16.5@161.744,158.958 ccw(c161.608,159.094) 161.8,159.094 ; 161.8,159.147 ccw(c162.067,159.147) RR16.5@161.878,158.958
AIC_MCLK: R45.2 R47.1 U10.4 | length 17.1
  Bottom Layer w0.21: R45.2@156.571,152.781 156.571,152.821 157.63,153.88 162.88,153.88 164.505,155.505 U10.4@165.928,155.505 165.928,156.172 ; R45.2@156.591,153.056 ccw(c156.591,153.575) 156.958,153.208 ; R45.2@156.886,152.761 cw(c157.791,152.761) 157.151,153.401 ; R47.1@165.472,156.71 cw(c165.363,156.5) 165.6,156.5 ; R47.1@165.502,157.039 ccw(c165.84,156.825) 165.557,156.543 ; R47.1@165.6,156.95 165.6,156.5 ; R47.1@165.68,156.926 ccw(c166.066,156.681) 165.743,156.357 ; R47.1@165.731,156.704 ccw(c165.824,156.5) 165.6,156.5 ; U10.4@165.79,155.367 ccw(c165.457,155.034) 165.457,155.505 ccw(c165.457,155.976) U10.4@165.79,155.643 ; U10.4@165.79,155.793 ccw(c165.457,156.126) 165.928,156.126 ccw(c166.399,156.126) U10.4@166.066,155.793 ; R47.1@165.857,156.814 ccw(c166.293,156.537) 165.928,156.172 ; 165.6,156.5 165.928,156.172
AIC_WCLK: RR16.7 U11.3 | length 3.7
  Bottom Layer w0.21: U11.3@162.127,161.385 162.127,160.793 163.4,159.52 RR16.7@163.4,158.6 ; RR16.7@163.344,158.958 ccw(c163.208,159.094) 163.4,159.094 ; 163.4,159.147 ccw(c163.667,159.147) RR16.7@163.478,158.958
AVDD: C71.1 C75.1 C78.1 C80.1 C81.1 C82.1 C83.1 L9.2 U11.18 U11.24 U11.25 | length 46.4
  Top Layer w0.5: v5(161.15,169.9) 164.05,169.9 166.05,167.9 166.25,167.9 v6@167.5,166.65 ; v5@161.362,169.688 cw(c161.874,169.176) 161.874,169.9 cw(c161.874,170.624) v5@161.362,170.112 ; 165.709,168.241 cw(c165.367,167.9) v6@165.85,167.9 ; v6@166,167.75 cw(c166,166.784) 166.683,167.467 ; 166.988,167.162 cw(c166.476,166.65) v6@167.2,166.65
  Bottom Layer w0.2: C75.1@159.808,167.428 cw(c159.038,166.658) U11.18@160.127,166.658 ; C75.1@159.949,167.569 cw(c159.521,167.141) 160.127,167.141 ; C75.1@159.95,167.55 160.127,167.373 U11.18@160.127,166.385 ; 160.127,167.174 cw(c160.486,167.174) C75.1@160.232,167.428
  Bottom Layer w0.25: U11.24@163.127,166.385 163.127,166.627 163.275,166.775 ; 163.403,166.775 ccw(c163.403,166.384) 163.127,166.66 cw(c163.275,166.622) 163.275,166.775 ; U11.25@163.877,165.635 164.185,165.635 C78.1@165.15,166.6 ; 164.656,167.306 ccw(c163.94,168.021) C80.1@164.952,168.021 ; 164.667,166.117 cw(c165.227,165.557) C78.1@165.227,166.349 ; 164.795,166.245 ccw(c164.416,166.624) C78.1@164.952,166.624 ; C80.1@165.003,167.653 cw(c165.227,167.43) C80.1@165.227,167.746 ; C80.1@165.299,167.949 164.125,166.775 163.275,166.775
  Bottom Layer w0.5: C83.1@157.861,169.164 159.836,169.164 L9.2@159.9,169.1 ; C83.1@157.936,169.294 ccw(c158.273,169.878) 158.448,169.227 ; C83.1@158.215,169.164 ccw(c158.215,170.96) L9.2@159.485,169.69 ; L9.2@159.685,169.16 cw(c158.876,168.351) 160.02,168.351 ; L9.2@159.95,169.05 160.02,168.98 C75.1@160.02,167.64 ; L9.2@159.95,169.3 ccw(c159.95,170.507) v5@160.804,169.654 ; L9.2@159.95,169.8 ccw(c159.95,172.214) 161.657,170.507 ; 160.02,168.689 cw(c160.686,168.689) L9.2@160.215,169.16 ; L9.2@160.15,169 162.092,170.942 162.43,170.942 ; L9.2@160.307,169.893 cw(c160.462,169.301) v5@160.924,169.703 ; L9.2@160.459,169.455 ccw(c160.028,170.201) v5@160.86,169.978 ; L9.2@160.467,169.317 cw(c161.15,168.634) v5@161.15,169.6 ; 160.627,169.552 cw(c160.92,169.043) v5@161.072,169.61 ; 160.709,169.559 ccw(c160.367,169.9) v5@160.85,169.9 ; v5@160.85,169.7 ccw(c158.846,171.704) C71.1@161.68,171.704 ; v5@161.15,170.2 ccw(c161.15,170.683) 161.491,170.341 ; v5@161.437,169.989 cw(c162.517,170.325) 161.537,170.89 ; v5@161.447,169.939 cw(c162.086,170.024) 161.697,170.537 ; v5@161.45,169.9 cw(c162.416,169.9) 161.733,170.583 ; 161.703,170.553 ccw(c160.553,171.704) C71.1@162.18,171.704 ; C71.1@162.202,171.438 cw(c161.776,170.942) 162.43,170.942 ; C71.1@162.658,171.438 ccw(c163.084,170.942) 162.43,170.942 ; C78.1@165.227,166.624 166.626,166.624 C81.1@166.65,166.6 ; C80.1@165.227,168.021 C82.1@165.227,169.223
  other v6: 167.35,166.65 166,167.9
BSEL: R37.2 U7.15 | length 5.8
  Top Layer w0.2: U7.15@126.504,168.35 127.35,168.35 127.65,168.65 127.65,169.95 128.3,170.6 R37.2@129.05,170.6 R37.2@129.1,170.6 ; U7.15@127.154,168.375 ccw(c127.154,168.909) 127.531,168.531 ; R37.2@128.838,170.388 ccw(c128.326,169.876) 128.326,170.6 ccw(c128.326,171.324) R37.2@128.838,170.812
CAN_RX: P20.43
CAN_TX: P20.41
CCDC_D0: P18.23 P19.91 | length 57
  Top Layer w0.21: 115.26,134.25 cw(c115.26,133.378) P18.23@115.877,133.995 ; 115.554,134.25 ccw(c115.554,134.706) P18.23@115.877,134.383 ; 115.85,125.95 cw(c115.85,125.579) v1@116.216,125.644 ; v1@116.009,125.607 ccw(c115.6,125.535) 115.6,125.95 ; v1@116.013,125.713 ccw(c115.777,125.777) 115.95,125.95 ; v1@116.187,125.887 cw(c116.123,126.123) 115.95,125.95 ; v1(116.25,125.65) 115.95,125.95 ; P18.23@116.716,134.189 116.655,134.25 114.3,134.25 113.075,135.475 113.075,139.901 112.521,140.455 111.979,140.455 110.945,139.421 110.945,133.093 110.95,133.088 110.95,130.6 115.6,125.95 ; v1(137,127.3) P19.91@139.2,127.3 ; v1@137.173,127.127 cw(c137.591,126.709) 137.591,127.3 cw(c137.591,127.891) v1@137.173,127.473 ; P19.91@138.347,127.197 ccw(c138.1,126.95) 138.1,127.3 ccw(c138.1,127.65) P19.91@138.347,127.403 ; 115.6,125.95 115.95,125.95
  Bottom Layer w0.21: v1(116.25,125.65) 116.885,126.285 120.201,126.285 120.661,125.825 124.986,125.825 124.991,125.83 130.56,125.83 130.83,126.1 135.473,126.1 136.523,127.15 ; v1@116.25,125.895 ccw(c116.25,126.486) 116.668,126.068 ccw(c117.086,125.65) v1@116.495,125.65 ; v1@136.759,127.346 cw(c136.523,127.39) 136.523,127.15 ; v1(137,127.3) 136.85,127.15 136.523,127.15
CCDC_D1: P18.21 P19.92 | length 37.5
  Top Layer w0.21: P18.21@116.716,135.459 117.809,135.459 ; P18.21@117.337,135.316 ccw(c117.428,135.865) 117.822,135.472 ; P18.21@117.372,135.523 ccw(c117.51,136.362) 118.111,135.761 ; P18.21@117.406,135.73 ccw(c117.592,136.858) v1(118.4,136.05) 117.809,135.459 ; P18.21@117.606,135.335 cw(c117.809,135.232) 117.809,135.459 ; P18.21@117.606,135.583 ccw(c117.809,135.686) 117.809,135.459 ; P18.21@117.719,135.535 ccw(c117.243,136.36) 118.163,136.113 cw(c117.592,136.267) 117.888,135.754 cw(c118.184,135.242) v1@118.337,135.813 ; 118.058,135.73 ccw(c117.944,135.927) v1@118.163,135.986 ; v1@118.155,136.05 cw(c117.564,136.05) 117.982,135.632 cw(c118.4,135.214) v1@118.4,135.805 ; 118.158,135.788 ccw(c117.935,136.174) v1@118.366,136.059 ; v1@126.577,136.527 cw(c126.159,136.109) 126.75,136.109 cw(c127.341,136.109) v1@126.923,136.527 ; v1(126.75,136.7) 126.75,130.314 130.989,126.075 132.211,126.075 133.436,127.3 P19.92@134.8,127.3 ; P19.92@133.947,127.197 ccw(c133.7,126.95) 133.7,127.3 ccw(c133.7,127.65) P19.92@133.947,127.403 ; v1@118.337,135.813 ccw(c118.277,135.591) 118.162,135.79 cw(c118.277,135.591) v1@118.337,135.813
  Bottom Layer w0.21: v1(118.4,136.05) 120.991,136.05 122.046,137.105 122.754,137.105 123.209,136.65 126.7,136.65 v1(126.75,136.7) ; v1@118.573,135.877 cw(c118.991,135.459) 118.991,136.05 cw(c118.991,136.641) v1@118.573,136.223 ; 126.038,136.65 ccw(c126.038,137.412) v1@126.577,136.873 ; 126.279,136.65 cw(c126.279,136.229) v1@126.577,136.527
CCDC_D2: P18.19 P19.89 | length 73.1
  Top Layer w0.21: v1@109.25,145.855 cw(c109.25,145.262) 109.669,145.681 ; v1(109.25,146.1) 109.9,145.45 113.9,141.45 113.9,138.45 115.65,136.7 ; v1@109.495,146.1 ccw(c110.085,146.1) 109.668,145.682 ; 114.833,137.517 ccw(c116.071,138.754) P18.19@116.071,137.004 ; 115.192,137.158 ccw(c116.071,138.037) P18.19@116.071,136.794 ; 115.55,136.8 ccw(c116.071,137.32) P18.19@116.071,136.584 ; P18.19@115.81,136.815 cw(c115.65,136.868) 115.65,136.7 ; P18.19@115.831,136.594 ccw(c115.65,136.492) 115.65,136.7 ; P18.19@116.65,136.7 115.65,136.7 ; P19.89@139.2,128.1 142.6,128.1 145.25,130.75 v1(145.25,131.6) ; P19.89@140.053,127.997 cw(c140.3,127.75) 140.3,128.1 cw(c140.3,128.45) P19.89@140.053,128.203 ; v1@145.076,131.426 cw(c144.658,131.008) 145.25,131.008 cw(c145.841,131.008) v1@145.423,131.426
  Bottom Layer w0.21: v1(109.25,146.1) 109.2,146.149 109.2,146.176 109.894,146.87 110.504,146.87 110.595,146.779 110.978,146.395 112.479,146.395 112.829,146.745 113.679,146.745 114.319,147.385 116.546,147.385 116.726,147.205 118.854,147.205 119.564,146.495 123.354,146.495 123.934,145.915 125.375,145.915 130.356,140.935 134.58,140.935 135.564,139.95 135.6,139.95 135.605,139.955 137.916,139.955 138.923,138.948 139.176,138.948 139.707,138.417 139.712,138.417 140.059,138.07 140.911,138.07 142.026,136.955 142.07,136.955 143.07,135.955 143.244,135.955 144.439,134.761 144.45,134.761 145.25,133.961 v1@145.25,131.4 ; v1@145.076,131.773 ccw(c144.658,132.192) 145.25,132.192 ; v1@145.25,131.4 v1(145.25,131.6) ; 145.25,132.191 ccw(c145.84,132.191) v1@145.423,131.773
CCDC_D3: P18.17 P19.90 | length 37
  Top Layer w0.21: P18.17@116.65,138 v1(118.3,138) ; P18.17@117.555,137.805 cw(c118.027,137.333) v1@118.027,138 ; P18.17@117.555,138.193 ccw(c118.022,138.66) v1@118.022,138 ; 117.812,137.942 cw(c117.886,137.664) v1@118.11,137.846 ; 117.812,138.056 ccw(c117.886,138.332) v1@118.109,138.153 ; 117.875,137.959 ccw(c117.784,138.298) v1@118.088,138.123 ; 117.878,138.039 cw(c117.788,137.704) v1@118.088,137.878 ; v1@118.127,137.827 ccw(c117.709,137.409) 117.709,138 ccw(c117.709,138.591) v1@118.127,138.173 ; v1(126.2,137.45) 126.15,137.5 126.15,137.7 126.495,137.355 127.021,137.355 127.405,136.971 127.405,130.238 131.159,126.485 132.041,126.485 132.665,127.109 132.665,127.688 133.076,128.1 P19.90@134.8,128.1 ; v1@126.373,137.276 cw(c126.563,137.087) 126.563,137.355 ; v1@126.373,137.623 ccw(c127.02,138.27) 127.02,137.355 ; P19.90@133.947,127.997 ccw(c133.7,127.75) 133.7,128.1 ccw(c133.7,128.45) P19.90@133.947,128.203
  Bottom Layer w0.21: v1(118.3,138) 118.35,138.05 118.5,138.05 119.35,138.9 124.95,138.9 126,137.85 ; v1@118.3,138.035 ccw(c118.3,138.482) 118.616,138.166 ; v1@118.3,138.245 ccw(c118.3,139.199) 118.974,138.524 ; v1@118.545,138 cw(c118.774,138) 118.612,138.162 ; 125.64,138.21 cw(c124.879,137.45) v1@125.955,137.45 ; 125.998,137.852 cw(c125.596,137.45) v1@126.165,137.45 ; v1@126.011,137.606 ccw(c125.872,137.722) 126,137.85 ; v1(126.2,137.45) 126.15,137.5 126.15,137.7 126,137.55 126,137.85
CCDC_D4: P18.15 P19.87 | length 66.1
  Top Layer w0.21: v1@110.15,145.955 cw(c110.15,145.364) 110.568,145.782 cw(c110.986,146.2) v1@110.395,146.2 ; v1(110.15,146.2) 114.7,141.65 114.7,140.35 115.8,139.25 P18.15@116.9,139.25 ; 115.106,139.944 ccw(c116.071,140.908) P18.15@116.071,139.544 ; 115.465,139.585 ccw(c116.071,140.191) P18.15@116.071,139.334 ; P19.87@139.2,128.9 142.4,128.9 144.3,130.8 v1(144.3,131.6) ; P19.87@140.053,128.797 cw(c140.3,128.55) 140.3,128.9 cw(c140.3,129.25) P19.87@140.053,129.003 ; v1@144.126,131.426 cw(c143.708,131.008) 144.3,131.008 cw(c144.891,131.008) v1@144.473,131.426
  Bottom Layer w0.21: v1@110.172,146.173 cw(c110.395,145.9) 110.644,146.149 ; v1@110.305,146.01 cw(c110.543,145.719) 110.809,145.985 ; v1@110.443,146.35 110.809,145.985 ; 141.889,136.545 141.856,136.545 140.741,137.66 139.889,137.66 139.542,138.007 139.537,138.007 139.056,138.488 136.452,138.488 135.759,139.18 135.754,139.18 134.41,140.525 130.175,140.525 125.825,144.875 125.825,144.885 125.206,145.505 123.764,145.505 123.184,146.085 121.569,146.085 120.979,145.495 117.856,145.495 116.376,146.975 114.489,146.975 113.849,146.335 112.999,146.335 112.649,145.985 110.809,145.985 ; 141.901,136.545 142.901,135.545 143.074,135.545 144.04,134.579 144.04,134.56 144.249,134.351 144.269,134.351 144.3,134.319 v1(144.3,131.6) ; v1@144.126,131.773 ccw(c143.708,132.192) 144.3,132.192 ; 144.3,132.191 ccw(c144.89,132.191) v1@144.473,131.773
CCDC_D5: P18.13 P19.88 | length 34.3
  Top Layer w0.21: P18.13@116.9,140.55 v1(118.25,140.55) ; P18.13@117.555,140.345 cw(c118.051,139.849) v1@118.051,140.55 ; P18.13@117.555,140.733 ccw(c117.998,141.176) v1@117.998,140.55 ; 117.794,140.605 ccw(c117.857,140.839) v1@118.053,140.695 ; 117.814,140.599 cw(c117.718,140.243) v1@118.038,140.427 ; v1@118.038,140.672 cw(c117.68,140.877) 117.787,140.479 cw(c117.856,140.219) v1@118.063,140.392 ; v1@118.077,140.377 ccw(c117.659,139.959) 117.659,140.55 ccw(c117.659,141.141) v1@118.077,140.723 ; v1(126.9,138.05) 126.906,138.05 127.85,137.106 127.85,130.373 131.328,126.895 131.871,126.895 132.255,127.278 132.255,127.858 133.296,128.9 P19.88@134.8,128.9 ; P19.88@133.947,128.797 ccw(c133.7,128.55) 133.7,128.9 ccw(c133.7,129.25) P19.88@133.947,129.003
  Bottom Layer w0.21: v1@118.25,140.305 cw(c118.25,139.714) 118.668,140.132 cw(c119.086,140.55) v1@118.495,140.55 ; v1(118.25,140.55) 119.49,139.31 125.64,139.31 v1(126.9,138.05) ; v1@126.655,138.05 ccw(c126.064,138.05) 126.482,138.468 ccw(c126.9,138.886) v1@126.9,138.295
CCDC_D6: P18.11 P19.85 | length 57.4
  Top Layer w0.21: v1@112.65,145.006 cw(c112.412,144.7) 112.8,144.7 ; v1(112.8,145.2) 112.8,144.7 ; v1@112.95,145.006 ccw(c113.188,144.7) 112.8,144.7 ; 114.953,142.547 ccw(c116.071,143.665) P18.11@116.071,142.084 ; 115.311,142.189 ccw(c116.071,142.948) P18.11@116.071,141.874 ; 115.67,141.83 ccw(c116.071,142.231) P18.11@116.071,141.664 ; P18.11@116.75,141.8 115.7,141.8 113.83,143.67 112.8,144.7 ; P19.85@139.2,129.7 142.1,129.7 143.2,130.8 v1(143.2,131.6) ; P19.85@140.053,129.597 cw(c140.3,129.35) 140.3,129.7 cw(c140.3,130.05) P19.85@140.053,129.803 ; v1@143.026,131.426 cw(c142.608,131.008) 143.2,131.008 cw(c143.791,131.008) v1@143.373,131.426
  Bottom Layer w0.21: v1@112.712,145.429 ccw(c112.664,145.556) 112.8,145.556 ; v1(112.8,145.2) 112.8,145.556 ; v1@112.888,145.429 cw(c112.936,145.556) 112.8,145.556 ; v1@143.026,131.773 ccw(c142.608,132.192) 143.2,132.192 ; v1@143.2,131.4 v1(143.2,131.6) ; v1@143.2,131.4 143.2,132.334 143.63,132.764 143.63,134.409 142.904,135.135 142.731,135.135 141.731,136.135 141.686,136.135 140.571,137.25 139.719,137.25 139.372,137.597 139.367,137.597 138.887,138.078 136.282,138.078 135.589,138.77 135.584,138.77 134.24,140.115 130.005,140.115 125.415,144.705 125.415,144.715 125.036,145.095 123.594,145.095 123.014,145.675 121.739,145.675 121.149,145.085 117.686,145.085 116.206,146.565 114.659,146.565 114.019,145.925 113.984,145.925 113.74,145.68 112.924,145.68 112.8,145.556 ; 143.2,132.191 ccw(c143.791,132.191) v1@143.373,131.773
CCDC_D7: P18.9 P19.86 | length 70.5
  Top Layer w0.21: v1@112.07,146.98 113.15,145.9 113.35,145.7 113.85,145.2 113.85,144.273 115.023,143.1 P18.9@116.716,143.1 ; 115.356,143.1 cw(c115.356,142.364) P18.9@115.877,142.885 ; 115.458,143.1 ccw(c115.458,143.692) P18.9@115.877,143.273 ; P19.86@134.8,129.7 136.376,129.7 137.855,131.178 137.855,131.821 ; P19.86@135.653,129.597 cw(c135.9,129.35) 135.9,129.7 cw(c135.9,130.05) P19.86@135.653,129.803 ; v1(137.573,132.45) 137.4,132.45 137.35,132.5 137.35,132.326 137.855,131.821 ; v1@137.603,132.432 ccw(c137.905,132.262) 137.66,132.016 ; v1@137.786,132.329 ccw(c138.154,132.12) 137.855,131.821
  Bottom Layer w0.21: v1(112.19,147.1) 112.19,147.116 113.374,148.3 117.05,148.3 117.1,148.25 ; v1@112.19,147.345 ccw(c112.19,147.897) 112.58,147.506 ; v1@112.435,147.1 cw(c113.066,147.1) 112.62,147.546 ; 117.113,148.263 117.351,148.025 119.194,148.025 119.903,147.315 123.694,147.315 124.274,146.735 125.541,146.735 125.546,146.74 125.71,146.74 129.051,143.399 130.695,141.755 134.919,141.755 135.884,140.79 138.241,140.79 139.263,139.768 139.516,139.768 140.046,139.237 140.051,139.237 140.399,138.89 141.25,138.89 142.365,137.775 142.41,137.775 143.41,136.775 143.584,136.775 144.778,135.581 144.79,135.581 146.315,134.055 146.315,131.159 145.646,130.49 142.946,130.49 142.591,130.135 140.459,130.135 139.735,130.859 139.735,130.865 138.11,132.49 138.096,132.49 138.086,132.5 137.35,132.5 137.4,132.45 v1(137.573,132.45) ; v1@137.746,132.623 ccw(c138.043,132.92) 138.043,132.5 ; v1@137.784,132.326 cw(c138.086,132.15) 138.086,132.5
CCDC_D8: P18.7 P19.83 | length 52
  Top Layer w0.21: v1@114.776,144.273 cw(c115.165,143.884) 115.165,144.435 ; v1(114.9,144.15) 115.185,144.435 ; v1@114.925,144.125 cw(c115.672,143.377) 115.672,144.435 ; v1@114.974,144.383 ccw(c115.037,144.582) 115.185,144.435 ; v1@115.073,143.976 cw(c116.179,142.87) P18.7@116.179,144.435 ; v1@115.133,144.224 cw(c115.333,144.287) 115.185,144.435 ; 115.2,144.435 cw(c115.2,143.478) P18.7@115.877,144.155 ; 115.614,144.435 ccw(c115.614,144.806) P18.7@115.877,144.543 ; P18.7@116.5,144.45 116.485,144.435 115.185,144.435 ; P19.83@139.2,130.5 141.6,130.5 142.2,131.1 142.15,131.15 v1(142.15,131.2) ; P19.83@140.053,130.397 cw(c140.3,130.15) 140.3,130.5 cw(c140.3,130.85) P19.83@140.053,130.603 ; 141.625,130.525 ccw(c140.951,131.2) v1@141.905,131.2 ; 141.984,130.884 ccw(c141.668,131.2) v1@142.115,131.2 ; 141.988,130.888 cw(c142.15,130.725) v1@142.15,130.955
  Bottom Layer w0.21: v1@114.659,144.198 ccw(c113.89,144.351) 114.445,144.905 ; 114.723,144.627 cw(c114.354,144.258) v1@114.865,144.157 ; v1(114.9,144.15) 114.9,144.45 114.445,144.905 ; v1(142.15,131.2) 142.15,131.15 142.365,131.364 142.365,132.079 143.22,132.934 143.22,134.24 142.735,134.725 142.549,134.725 142.425,134.849 142.425,134.861 141.561,135.725 141.516,135.725 140.401,136.84 139.549,136.84 139.202,137.187 139.197,137.187 138.717,137.668 136.112,137.668 135.419,138.36 135.415,138.36 134.07,139.705 129.836,139.705 125.005,144.535 125.005,144.546 124.866,144.685 123.425,144.685 122.845,145.265 121.909,145.265 121.319,144.675 117.517,144.675 116.037,146.155 114.828,146.155 114.445,145.771 114.445,144.905